# EAGLE board I2C_Servo v1 (EAGLE 7.2.0)
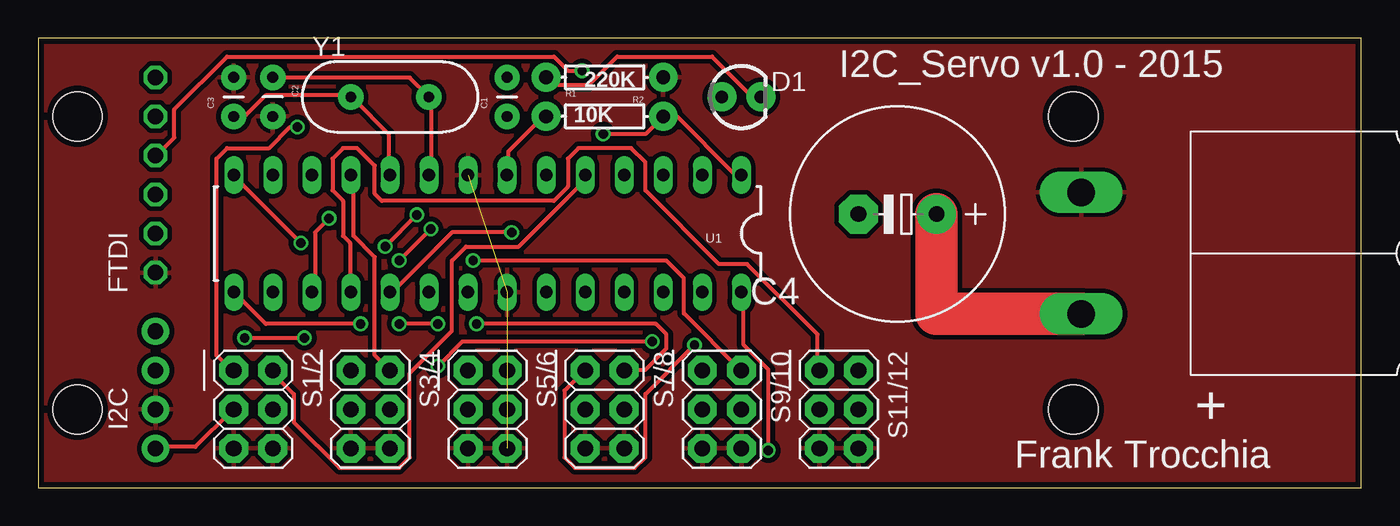
[diagram p0: board, top side]
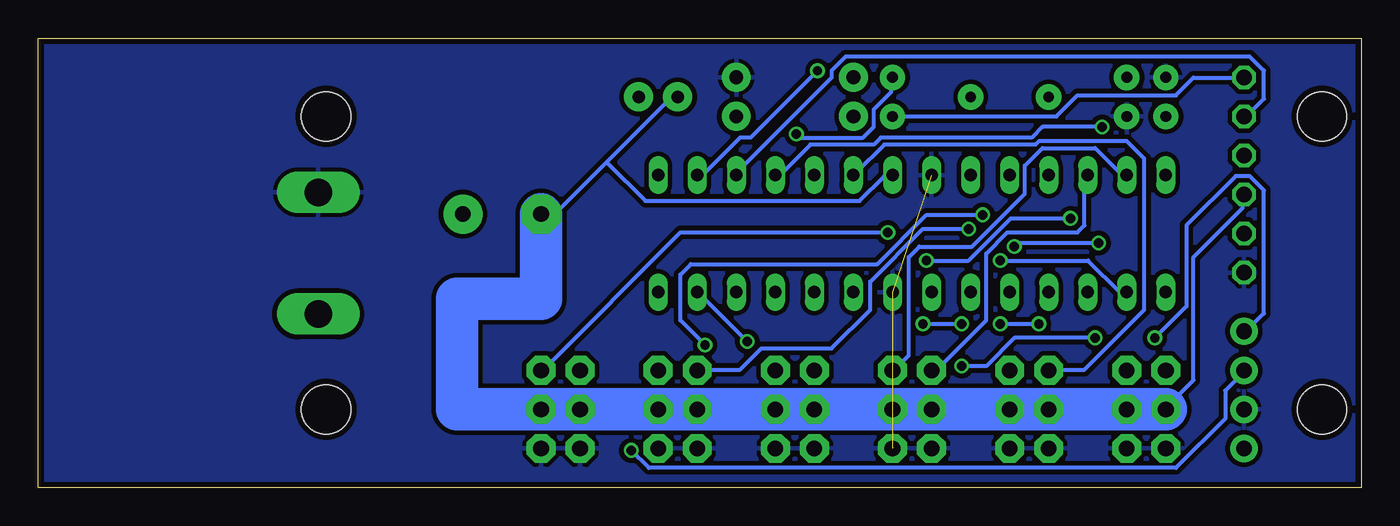
[diagram p1: board, bottom side, seen from below]

Size 86.03 x 29.2 mm. Coordinates in mm from the lower left corner, seen from the top.
Outline: 0,0 86.03,0 86.03,29.2 0,29.2 0,0
Copper layers (1*16): Top 0.0356mm / dielectric 1.5011mm / Bottom 0.0356mm
Design rules "LaenPCBOrder": minimum track width 6mil, minimum drill 13mil, track to track 6mil, track to pad 6mil, pad to pad 6mil, via to via 6mil, smd to smd 6mil, copper to edge 15mil, drill to drill 6mil, minimum pad ring 7mil, minimum via ring 7mil, stop-mask expansion 3mil, vias tented up to drill 0mil, thermal gap 10mil
Holes 3.2 mm at 67.31,24.13 67.31,5.08 2.54,24.13 2.54,5.08

## Footprints (pad centres in the part's own frame; a part is rotated, then mirrored left to right if it is on the bottom)
CAP-PTH-SMALL = drill 0.7 pad 1.651: 1 0,0; 2 2.54,0
E5-13 = drill 1.016 pad 2.54: + -2.54,0 | drill 1.016 pad 2.54 octagon: - 2.54,0
LED3MM = drill 0.813 pad 1.88: A -1.27,0; K 1.27,0
1X06-CLEAN = drill 1.016 octagon: 1 -6.35,0; 2 -3.81,0; 3 -1.27,0; 4 1.27,0; 5 3.81,0; 6 6.35,0
1X04-CLEANBIG = drill 1.016 pad 1.778: 1 -3.81,0; 2 -1.27,0; 3 1.27,0; 4 3.81,0
POWERPOLE_PAIR_25A_HORIZ_G2 = drill 1.8 long: BLACK -3.95,-7.1; RED 3.95,-7.1
AXIAL-0.3 = drill 0.9 pad 1.88: P$1 -3.81,0; P$2 3.81,0
2X03 = drill 1.016 pad 1.88 octagon: 1 -2.54,-1.27; 2 -2.54,1.27; 3 0,-1.27; 4 0,1.27; 5 2.54,-1.27; 6 2.54,1.27
DIL28-3 = drill 0.813 long: 1 -16.51,-3.81; 2 -13.97,-3.81; 3 -11.43,-3.81; 4 -8.89,-3.81; 5 -6.35,-3.81; 6 -3.81,-3.81; 7 -1.27,-3.81; 8 1.27,-3.81; 9 3.81,-3.81; 10 6.35,-3.81; 11 8.89,-3.81; 12 11.43,-3.81; 13 13.97,-3.81; 14 16.51,-3.81; 15 16.51,3.81; 16 13.97,3.81; 17 11.43,3.81; 18 8.89,3.81; 19 6.35,3.81; 20 3.81,3.81; 21 1.27,3.81; 22 -1.27,3.81; 23 -3.81,3.81; 24 -6.35,3.81; 25 -8.89,3.81; 26 -11.43,3.81; 27 -13.97,3.81; 28 -16.51,3.81
HC49US = drill 0.7 pad 1.651: 1 -2.54,0; 2 2.54,0

## Placement (x,y rotation side)
C1  .1uF  [CAP-PTH-SMALL]  30.48,24.13 90 top
C2  2pF  [CAP-PTH-SMALL]  15.24,26.67 270 top
C3  20pF  [CAP-PTH-SMALL]  12.7,24.13 90 top
C4  4700uF  [E5-13]  55.88,17.78 180 top
D1  [LED3MM]  45.72,25.4 0 top
FTDI  [1X06-CLEAN]  7.62,20.32 90 top
I2C  1X4-CLEANBIG  [1X04-CLEANBIG]  7.62,6.35 90 top
J1  POWERPOLE_POWER25A_HORIZONTAL_G2  [POWERPOLE_PAIR_25A_HORIZ_G2]  74.93,15.24 270 top
R1  10K  [AXIAL-0.3]  36.83,24.13 0 top
R2  220K  [AXIAL-0.3]  36.83,26.67 180 top
S1/2  [2X03]  13.97,5.08 270 top
S3/4  [2X03]  21.59,5.08 270 top
S5/6  [2X03]  29.21,5.08 270 top
S7/8  [2X03]  36.83,5.08 270 top
S9/10  [2X03]  44.45,5.08 270 top
S11/12  [2X03]  52.07,5.08 270 top
U1  ATMEGA328P_PDIP  [DIL28-3]  29.21,16.51 180 top
Y1  [HC49US]  22.86,25.4 0 top

## Library data of the parts
C1-C3 R1 R2 = SparkFun-Passives
C4 FTDI I2C = adafruit
D1 = SparkFun-LED
J1 = powerpoles
S1/2 S3/4 S5/6 S7/8 S9/10 S11/12 = SparkFun-Connectors
U1 = SparkFun-DigitalIC
Y1 = SparkFun-FreqCtrl

## Nets
+5V: C4.- D1.A FTDI.3 I2C.1 R1.P$1 S1/2.3 S1/2.4 S3/4.3 S3/4.4 S5/6.3 S5/6.4 S7/8.3 S7/8.4 S9/10.3 S9/10.4 S11/12.3 S11/12.4 U1.7
GND: C2.2 C3.2 FTDI.1 I2C.2 J1.BLACK R2.P$1 S1/2.5 S1/2.6 S3/4.5 S3/4.6 S5/6.5 S5/6.6 S7/8.5 S7/8.6 S9/10.5 S9/10.6 S11/12.5 S11/12.6 U1.8 U1.22
N$1: C1.1 FTDI.6
N$2: C2.1 U1.9 Y1.2
N$3: C3.1 U1.10 Y1.1
N$4: C4.+ J1.RED
N$5: D1.K R2.P$2
PIN2: S1/2.1 U1.4
PIN3: S1/2.2 U1.5
PIN4: S3/4.1 U1.6
PIN5: S3/4.2 U1.11
PIN6: S5/6.1 U1.12
PIN7: S5/6.2 U1.13
PIN8: S7/8.1 U1.14
PIN9: S7/8.2 U1.15
PIN10: S9/10.1 U1.16
PIN11: S9/10.2 U1.17
PIN12: S11/12.1 U1.18
PIN13: S11/12.2 U1.19
RST: C1.2 R1.P$2 U1.1
RX->TX: FTDI.5 U1.3
SCL: I2C.3 U1.28
SDA: I2C.4 U1.27
TX->RX: FTDI.4 U1.2

## Tracks (layer width: path | path; a pad name or v marks a point on that pad's centre or on a via)
+5V
  Top 0.254: U1.7 30.56,20.47 30.56,21.84 32.84,24.13 R1.P$1 | I2C.1 7.7,2.64 10.21,2.64 12.5,4.93 S1/2.3
  Bottom 0.254: FTDI.3 7.7,18.87 7.7,18.19 10.9,14.99 10.9,6.98 11.81,6.07 S1/2.3 | 49.07,21.16 52.05,18.19 C4.- | 49.07,21.16 44.96,25.27 44.5,25.27 D1.A | 49.07,21.16 46.56,18.64 32.61,18.64 31.01,20.24 30.56,20.24 U1.7
  Bottom 2.75: S1/2.3 S1/2.4 S3/4.3 S3/4.4 S5/6.3 S5/6.4 S7/8.3 S7/8.4 S9/10.3 S9/10.4 S11/12.3 S11/12.4 58.81,5.08 58.81,12.27 53.34,12.27 C4.-
GND  (2 unrouted)
  pour Top (isolate 0.305): 0.08,29.21 85.95,29.21 85.95,0 0.08,0
  pour Bottom (isolate 0.305): 0.08,29.21 85.95,29.21 85.95,0 0.08,0
N$1
  Bottom 0.254: C1.1 19.81,24.13 18.44,25.5 12.04,25.5 10.9,26.64 7.7,26.64 FTDI.6
N$2
  Top 0.254: U1.9 25.53,20.47 25.53,25.27 Y1.2 24.15,26.64 15.24,26.64 C2.1
N$3
  Top 0.254: U1.10 22.78,20.47 22.78,22.99 20.5,25.27 Y1.1 20.27,25.5 14.78,25.5 13.41,24.13 C3.1
N$4
  Top 2.75: J1.RED 58.42,11.29 C4.+
N$5
  Top 0.254: D1.K 46.79,25.5 46.33,25.5 43.82,28.02 37.64,28.02 35.81,26.19 33.53,26.19 33.07,26.64 R2.P$2
PIN2  (via drill 0.61)
  Top 0.254: v16.84,23.44 16.38,23.44 15.01,22.07 12.27,22.07 11.58,21.39 11.58,8.59 12.5,7.67 S1/2.1
  Bottom 0.254: v16.84,23.44 20.73,23.44 21.41,22.76 31.24,22.76 31.7,22.3 35.81,22.3 37.64,20.47 38.1,20.47 U1.4
PIN3
  Top 0.254: U1.5 35.36,20.24 35.36,19.79 31.24,15.67 27.81,15.67 26.9,14.76 26.9,10.18 24.15,7.44 24.15,1.96 23.47,1.27 19.58,1.27 16.61,4.24 16.61,6.07 15.24,7.44 S1/2.2
PIN4
  Bottom 0.254: U1.6 32.84,20.47 31.01,22.3 21.18,22.3 20.95,22.53 15.24,22.53 14.1,21.39 14.1,11.56 17.98,7.67 20.27,7.67 S3/4.1
PIN5
  Top 0.254: U1.11 20.5,20.24 20.5,16.36 21.87,14.99 21.87,8.59 22.78,7.67 S3/4.2
PIN6
  Bottom 0.254: U1.12 17.98,20.24 17.98,17.04 18.44,16.59 23.01,16.59 24.38,15.21 24.38,10.87 27.81,7.44 S5/6.1
PIN7
  Bottom 0.254: U1.13 15.24,20.47 15.7,20.47 17.3,22.07 20.73,22.07 21.87,20.93 21.87,19.1 25.3,15.67 28.73,15.67 29.41,14.99 29.41,8.59 30.33,7.67 S5/6.2
PIN8  (via drill 0.61)
  Top 0.254: v17.07,15.9 12.72,20.24 U1.14 | v24.61,17.73 v22.55,15.67 | v42.67,9.27 39.47,6.07 39.47,1.96 38.79,1.27 34.9,1.27 34.21,1.96 34.21,6.3 35.36,7.44 S7/8.1
  Bottom 0.254: v17.07,15.9 22.33,15.9 v22.55,15.67 | v24.61,17.73 28.27,17.73 31.47,14.53 43.59,14.53 44.27,13.84 44.27,10.87 v42.67,9.27
PIN9  (via drill 0.61)
  Top 0.254: v20.95,10.64 14.78,10.64 12.72,12.7 U1.15 | v25.98,10.64 v23.47,10.64 | v28.5,10.64 40.16,10.64 40.84,9.96 40.84,9.04 39.47,7.67 38.1,7.67 S7/8.2
  Bottom 0.254: v23.47,10.64 v20.95,10.64 | v28.5,10.64 v25.98,10.64
PIN10  (via drill 0.61)
  Top 0.254: v25.53,16.82 v23.47,14.76
  Bottom 0.254: U1.16 15.7,12.7 17.75,14.76 v23.47,14.76 | v25.53,16.82 28.5,16.82 31.93,13.39 31.93,11.56 34.44,9.04 39.01,9.04 40.39,7.67 43.13,7.67 S9/10.1
PIN11  (via drill 0.61)
  Top 0.254: v18.9,17.5 17.98,16.59 17.98,12.7 U1.17 | v28.27,14.76 40.84,14.76 41.99,13.61 41.99,11.33 45.64,7.67 S9/10.2
  Bottom 0.254: v18.9,17.5 22.78,17.5 25.53,14.76 v28.27,14.76
PIN12
  Top 0.254: U1.18 20.27,12.7 20.27,15.9 19.81,16.36 19.81,18.64 19.13,19.33 19.13,21.39 19.81,22.07 20.73,22.07 21.87,20.93 21.87,19.1 22.33,18.64 33.53,18.64 34.44,19.56 34.44,21.39 35.13,22.07 38.56,22.07 39.47,21.16 39.47,19.33 44.27,14.53 46.1,14.53 50.67,9.96 50.67,7.67 S11/12.1
PIN13  (via drill 0.61)
  Top 0.254: v30.79,16.59 26.9,16.59 23.01,12.7 U1.19
  Bottom 0.254: v30.79,16.59 44.27,16.59 53.19,7.67 S11/12.2
RST  (via drill 0.61)
  Top 0.254: U1.1 45.64,20.47 45.19,20.47 41.53,24.13 R1.P$2 40.62,24.13 39.47,22.99 v36.73,22.99
  Bottom 0.254: v36.73,22.99 36.5,22.76 32.38,22.76 31.7,23.44 31.7,24.59 30.56,25.73 30.56,26.64 C1.2
RX->TX
  Bottom 0.254: U1.3 40.62,20.47 34.44,26.64 34.44,27.1 33.53,28.02 7.24,28.02 6.33,27.1 6.33,25.27 7.47,24.13 FTDI.5
SCL  (via drill 0.61)
  Top 0.254: v47.47,2.41 47.47,7.67 45.87,9.27 45.87,12.7 U1.28
  Bottom 0.254: v47.47,2.41 46.33,1.27 12.04,1.27 8.84,4.47 8.84,6.3 7.7,7.44 I2C.3
SDA  (via drill 0.61)
  Top 0.254: v39.93,9.5 27.58,9.5 v25.98,7.9 | v13.41,9.73 v17.3,9.73
  Bottom 0.254: v39.93,9.5 43.13,12.7 U1.27 | v25.98,7.9 24.38,7.9 22.55,9.73 v17.3,9.73 | v13.41,9.73 11.35,11.79 11.35,17.04 8.15,20.24 7.24,20.24 6.33,19.33 6.33,11.33 7.47,10.18 I2C.4
TX->RX  (via drill 0.61)
  Top 0.254: v35.36,27.1 34.44,27.1 33.53,28.02 12.27,28.02 8.84,24.59 8.84,22.76 7.7,21.61 FTDI.4
  Bottom 0.254: v35.36,27.1 39.7,22.76 40.39,22.76 42.67,20.47 43.13,20.47 U1.2

## Text on the board
_tsilk: I2C_Servo v1.0 - 2015 | Frank Trocchia